# Altium PCB PCB_FreqResp.PcbDoc
Units mm, origin at the board's own origin, x right, y up, seen from the top; angles counter-clockwise.
Board outline 50.16 x 43.43 mm, 2 copper layers (Top Layer, Bottom Layer); 67 components, 38 nets, 235 pads, 54 vias.
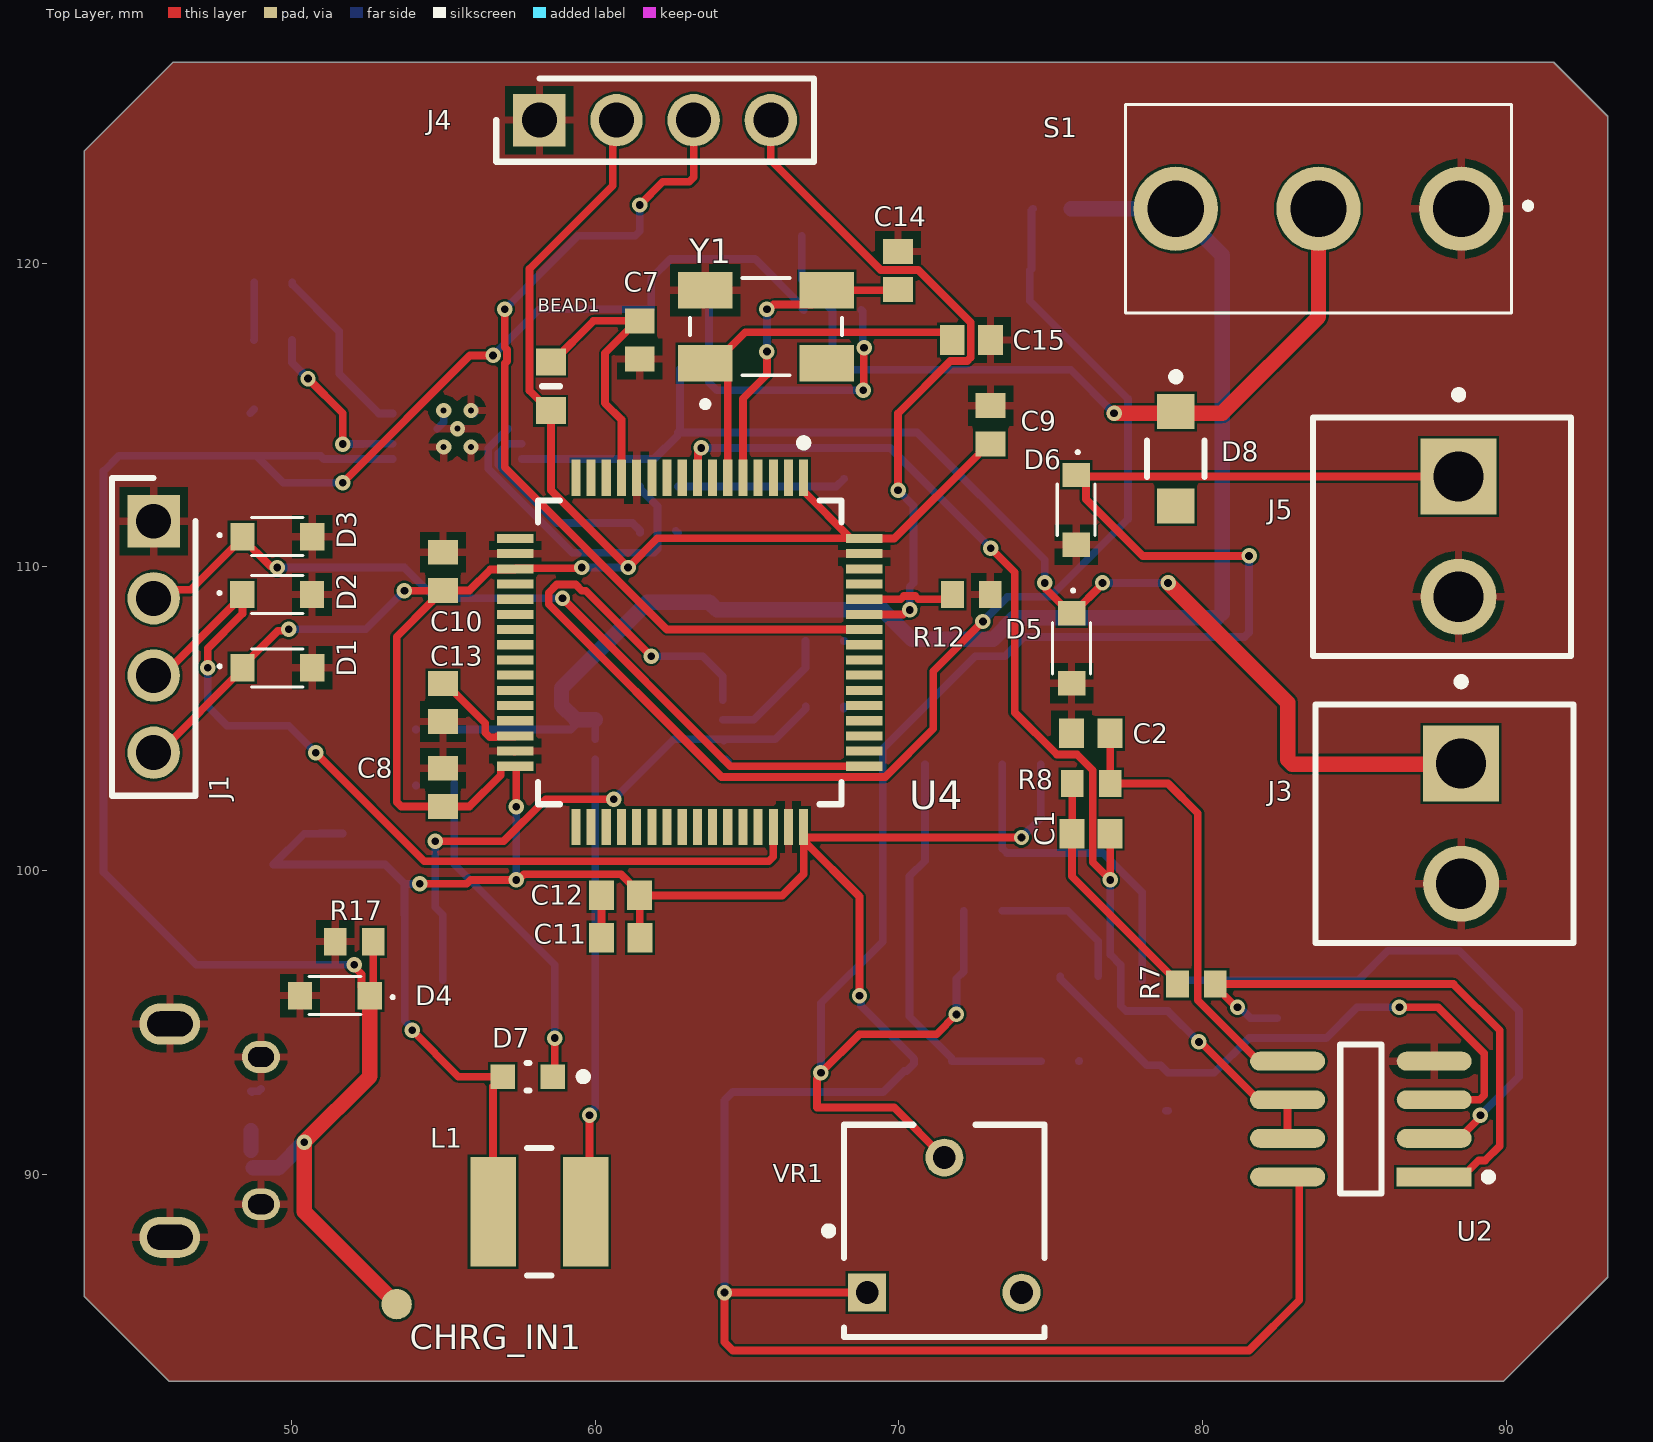
[diagram p0: Top Layer view]
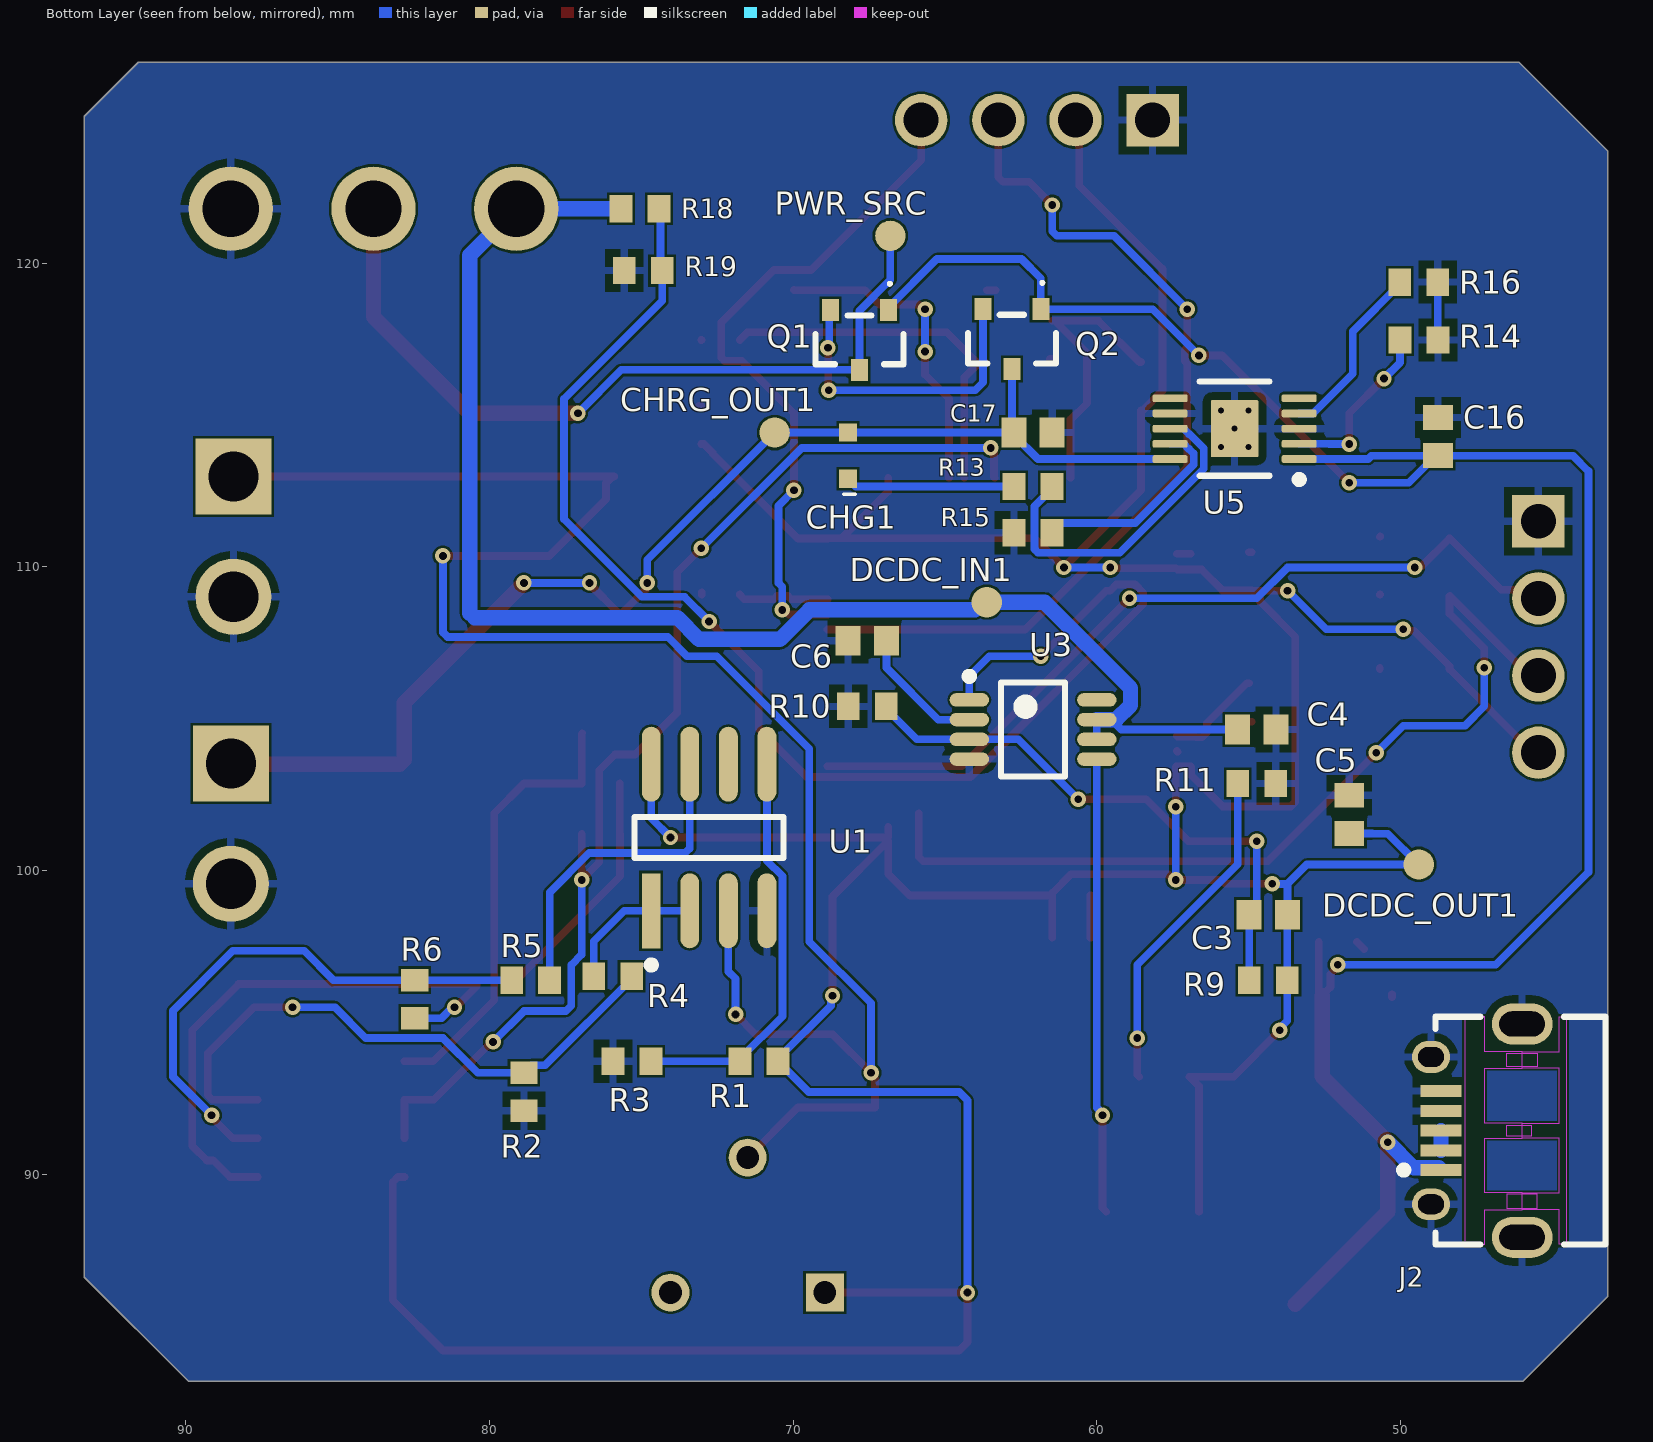
[diagram p1: Bottom Layer view, seen from below]
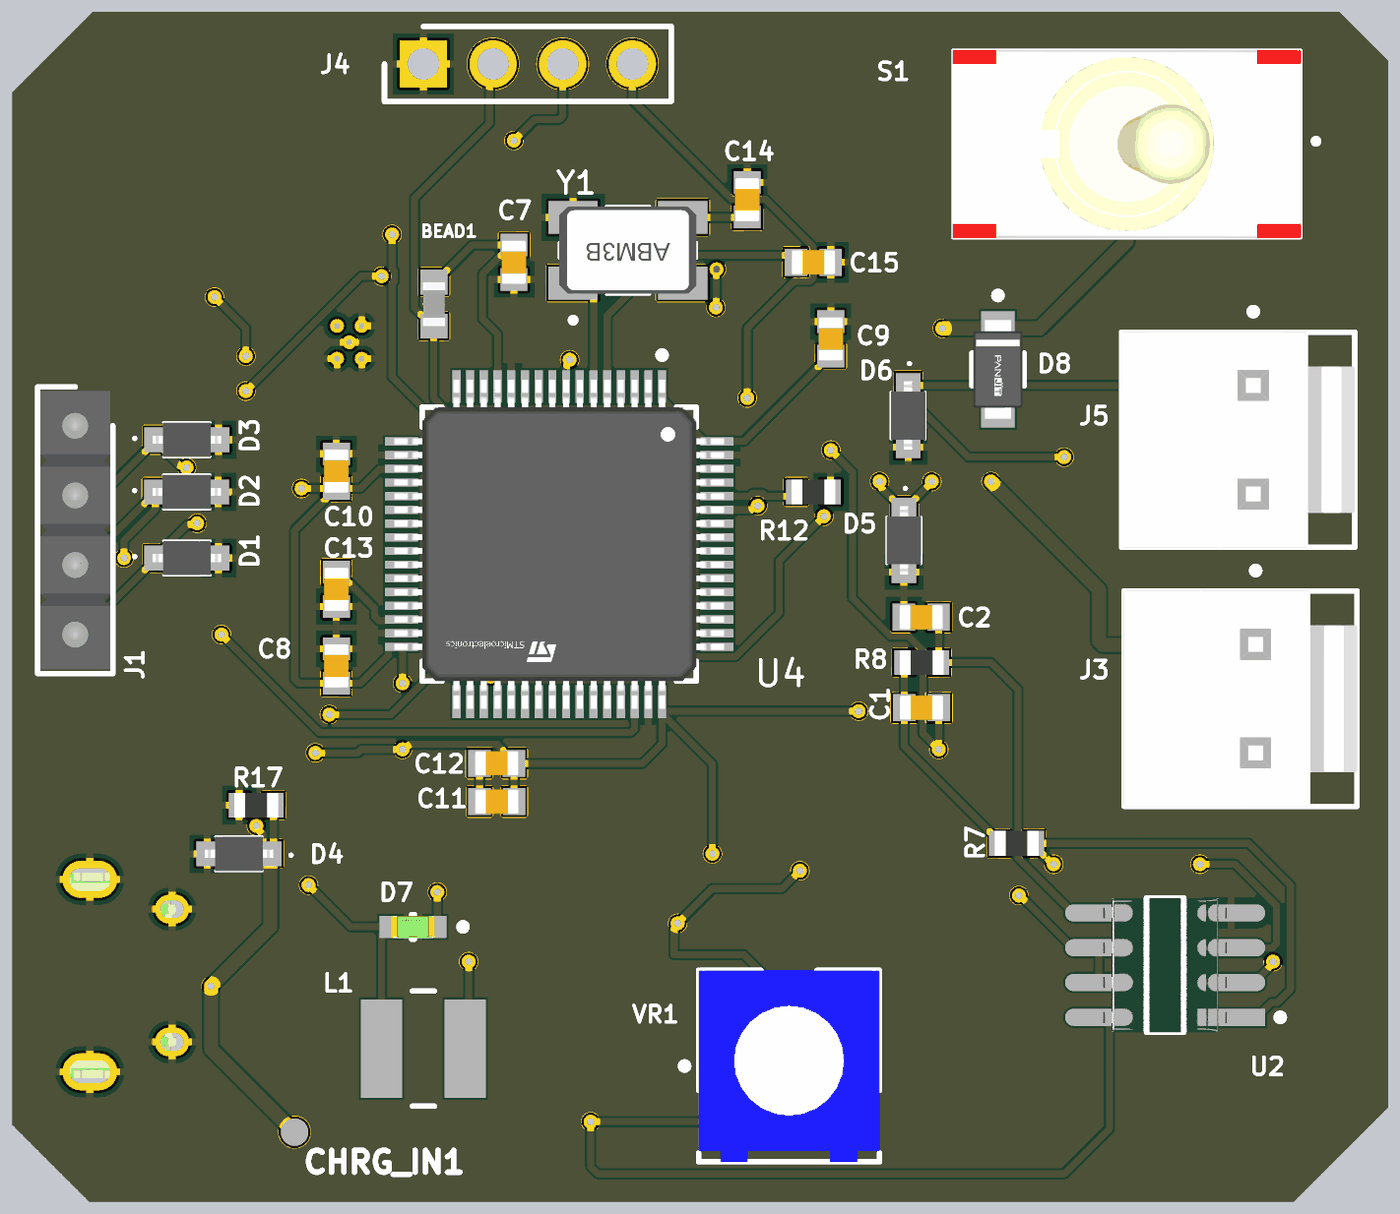
[diagram p2: 3D render of the assembled board from above, using the file's embedded part models]
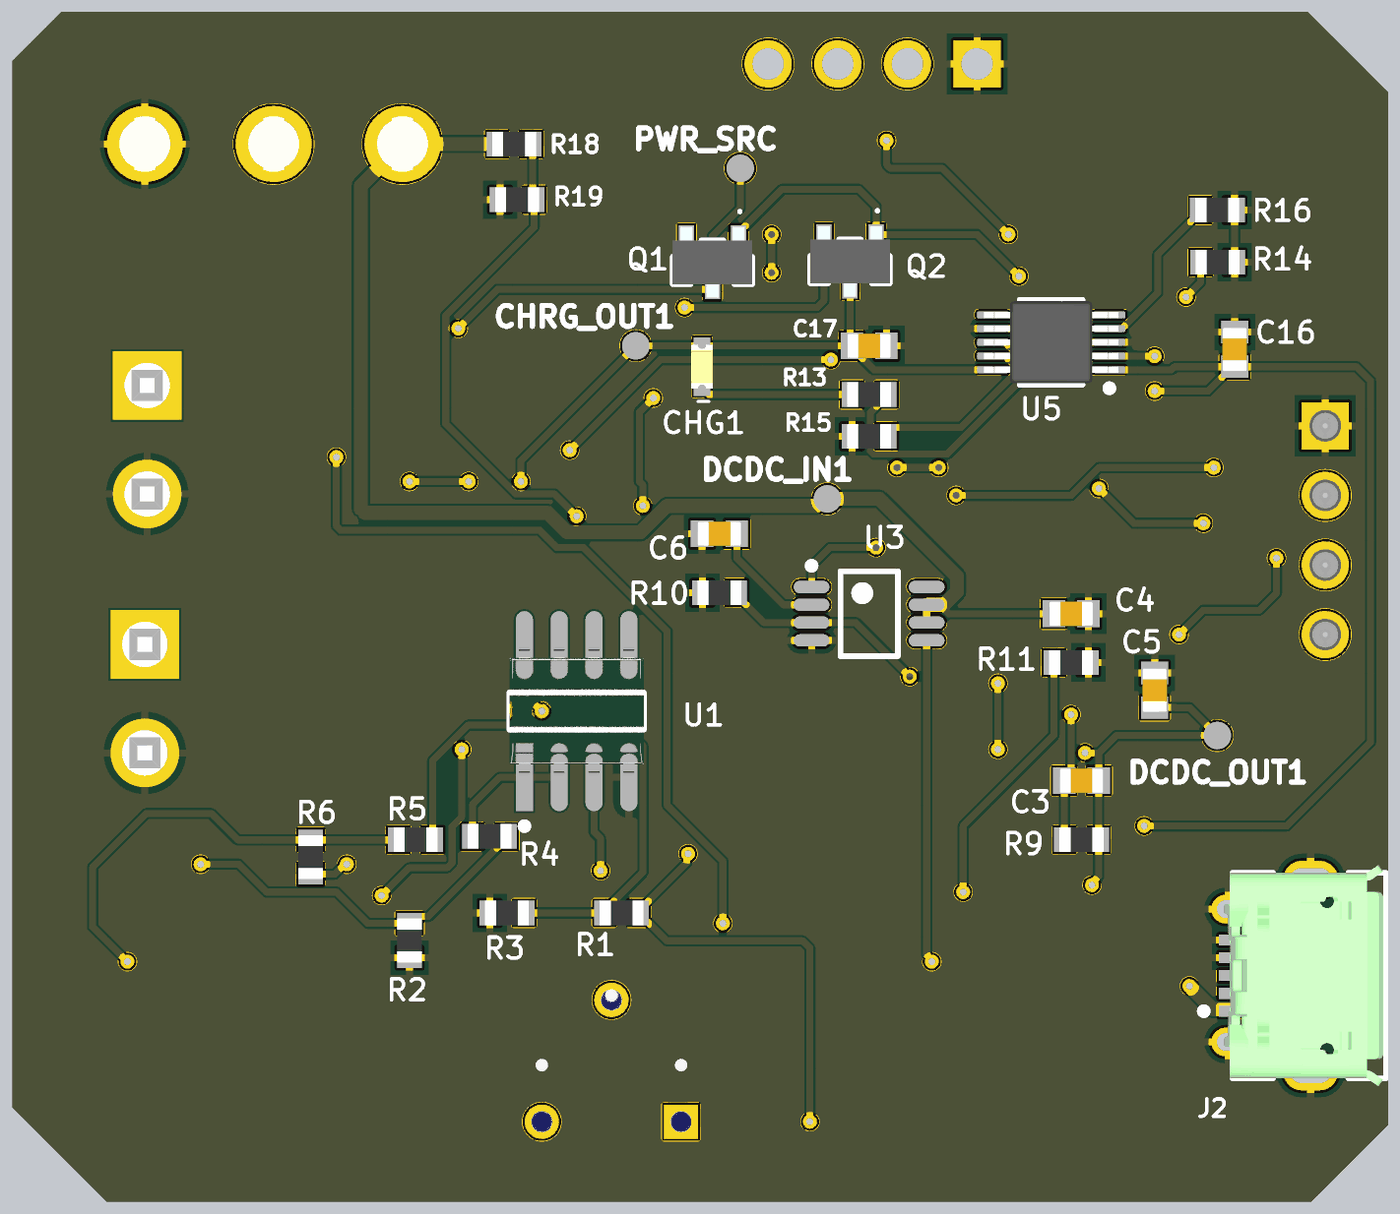
[diagram p3: 3D render of the assembled board from below, using the file's embedded part models]

## Layer stack, top to bottom
Top Solder: solder mask 0.0102, Solder Resist, Dk 3.5
Top Layer: signal copper 0.0356
Dielectric 1: dielectric 0.32, FR-4, Dk 4.8
Bottom Layer: signal copper 0.0356
Bottom Solder: solder mask 0.0102, Solder Resist, Dk 3.5

## Board outline
43.18,123.698 46.101,126.619 91.567,126.619 93.345,124.841 93.345,86.614 89.916,83.185 45.974,83.185 43.18,85.979 43.18,86.614

## Design rules (kind name [scope] priority, off if disabled: settings)
Clearance [All] p1: gap=0.076 ignorepadtopadclearanceinfootprint=FALSE except(0: Arc-Hole Track-Hole SMDPad-Hole THPad-Hole Via-Hole Fill-Hole Poly-Hole Region-Hole Text-Hole)
Height [All] p1: minheight=0 maxheight=30.4 prefheight=12.7
MinimumSolderMaskSliver [All] p1: minsoldermaskwidth=0.025
PolygonConnect [All] p1: connectstyle=Relief reliefconductorwidth=0.254 reliefentries=4 polygonreliefangle="90 Angle" airgapwidth=0.254
RoutingVias [All] p1: holewidth=0.254 width=0.508 viastyle="Through Hole" minholewidth=0.102 minwidth=0.203 maxholewidth=0.711 maxwidth=1.27
SilkToSilkClearance [All] p1: silktosilkclearance=0.127
SilkToSolderMaskClearance [IsPad] p1: minsilkscreentomaskgap=0 clearancetoexposedcopper=TRUE
SolderMaskExpansion [All] p1: expansion=0.102 istentingtop=FALSE
Width [All] p1: maxlimit=0.508 minlimit=0.254 preferedwidth=0.254 minimp=50.000000 maximp=50.000000 favimp=50.000000
26 further rules are at their usual default settings.

## Components (designator, comment, footprint, x,y, rotation, side; value= is the part's Value field where it differs from the comment)
BEAD1 "C710390" BEADC1608X95N 58.547,115.951 r90 top
C1 "C309479" "New footprint 1" 76.332,101.219 r0 top
C2 "C309479" "New footprint 1" 76.322,104.521 r0 top
C3 "C63680" "New footprint 1" 54.356,98.552 r180 bottom
C4 "C90806" "New footprint 1" 54.737,104.648 r0 bottom
C5 "C93926" "New footprint 1" 51.689,101.854 r270 bottom
C6 "C113801" "New footprint 1" 67.564,107.569 r180 bottom
C7 "C105907" "New footprint 1" 61.468,117.475 r90 top
C8 "C309479" "New footprint 1" 54.991,102.743 r270 top
C9 "C105907" "New footprint 1" 73.025,114.681 r270 top
C10 "C105907" "New footprint 1" 54.991,109.855 r270 top
C11 "C105907" "New footprint 1" 60.843,97.79 r0 top
C12 "C105907" "New footprint 1" 60.838,99.187 r0 top
C13 "C77045" "New footprint 1" 54.991,105.537 r90 top
C14 "C63680" "New footprint 1" 69.977,119.761 r90 top
C15 "C63680" "New footprint 1" 72.39,117.475 r0 top
C16 "C309479" "New footprint 1" 48.768,114.295 r270 bottom
C17 "C77045" "New footprint 1" 62.103,114.427 r0 bottom
CHG1 "SMLD12EN1WT86" LEDM168X65N 68.199,113.665 r90 bottom
CHRG_IN1 "Test Pad" "Test Pad-Footprint-1" 53.467,85.725 r90 top (schematic designator Chgr_IN1)
CHRG_OUT1 "Test Pad" "Test Pad-Footprint-1" 70.612,114.427 r0 bottom (schematic designator Chgr_OUT1)
D1 "C484328" 1SS357TPH3F 49.537,106.68 r270 top
D2 "C484328" 1SS357TPH3F 49.53,109.093 r270 top
D3 "C484328" 1SS357TPH3F 49.537,110.998 r270 top
D4 "C484328" 1SS357TPH3F 51.435,95.885 r90 top
D5 "C484328" 1SS357TPH3F 75.692,107.322 r180 top
D6 "C484328" 1SS357TPH3F 75.844,111.88 r180 top
D7 "SMD 1.6X0.8MM" FP-APT1608LZGCK-MFG 57.785,93.218 r180 top
D8 "C191986" FP-MBR1020VL_R1_00001-MFG 79.121,113.564 r270 top
DCDC_IN1 "Test Pad" "Test Pad-Footprint-1" 63.627,108.839 r90 bottom
DCDC_OUT1 "Test Pad" "Test Pad-Footprint-1" 49.403,100.203 r180 bottom
J1 "61300411121" HDRV4W95P0X254_1X4_1016X254X854P 45.466,111.506 r270 top
J2 "ZX62D-B-5P8" HIRO-ZX62D-B-5P8_V 47.498,91.44 r90 bottom
J3 "B2P-VH-B(LF)(SN)" FP-B2P-VH-B_LF_SN-MFG 87.969,101.548 r270 top
J4 "61300411121" HDRV4W95P0X254_1X4_1016X254X854P 58.166,124.714 r0 top
J5 "B2P-VH-B(LF)(SN)" FP-B2P-VH-B_LF_SN-MFG 87.884,110.998 r270 top
L1 "C340379" FP-SRN4018-MFG 58.165,88.773 r180 top value=4.7uH
PWR_SRC "Test Pad" "Test Pad-Footprint-1" 66.802,120.904 r180 bottom (schematic designator Pwr_Src1)
Q1 "C113491" TSM260P02CXRFG 67.818,117.475 r0 bottom
Q2 "C113491" TSM260P02CXRFG 62.799,117.506 r0 bottom
R1 "C103210" "0603 resistor-Footprint-1" 71.13,93.726 r0 bottom
R2 "" "0603 resistor-Footprint-1" 78.867,92.72 r270 bottom
R3 "C103210" "0603 resistor-Footprint-1" 75.311,93.726 r0 bottom
R4 "C103198" "0603 resistor-Footprint-1" 75.946,96.52 r180 bottom
R5 "C103198" "0603 resistor-Footprint-1" 78.647,96.393 r0 bottom
R6 "" "0603 resistor-Footprint-1" 82.467,95.768 r270 bottom
R7 "C153133" "0603 resistor-Footprint-1" 79.8,96.266 r180 top
R8 "C153133" "0603 resistor-Footprint-1" 76.337,102.87 r0 top
R9 "C403386" "0603 resistor-Footprint-1" 54.356,96.393 r180 bottom
R10 "C100930" "0603 resistor-Footprint-1" 67.564,105.41 r0 bottom
R11 "C176127" "0603 resistor-Footprint-1" 54.737,102.87 r180 bottom
R12 "C103210" "0603 resistor-Footprint-1" 72.39,109.093 r0 top
R13 "C176127" "0603 resistor-Footprint-1" 62.103,112.649 r0 bottom
R14 "C116693" "0603 resistor-Footprint-1" 49.393,117.475 r180 bottom
R15 "C153133" "0603 resistor-Footprint-1" 62.103,111.125 r0 bottom
R16 "C105576" "0603 resistor-Footprint-1" 49.403,119.38 r180 bottom
R17 "C103210" "0603 resistor-Footprint-1" 52.07,97.663 r180 top
R18 "C153133" "0603 resistor-Footprint-1" 75.047,121.793 r180 bottom
R19 "C153133" "0603 resistor-Footprint-1" 74.94,119.761 r0 bottom
S1 "100SP1T1B4M2QE" 100SP1T1B4M2QE 83.821,121.793 r180 top
U1 "LM358BAIDR" FP-D0008A-IPC_A 72.771,101.093 r90 bottom
U2 "LM358BAIDR" FP-D0008A-IPC_A 85.218,91.821 r180 top
U3 "LTC3404EMS8#PBF" LT-MS8_L 62.103,104.648 r180 bottom
U4 "STM32F401RET6" FP-LQFP64-5W-MFG 63.119,107.188 r270 top
U5 "BQ24090DGQR" DGQ0010D_L 55.465,114.554 r0 bottom
VR1 "3362P-1-103LF" BOUR-3362P 71.501,88.138 r0 top
Y1 "ABM3B-8.000MHZ-10-1UT" XTAL_ABM3B-8.000MHZ-10-1UT 65.627,117.913 r0 top

## Footprints (in the part's own frame and the unit in brackets; to place one, negate y for a bottom-side part, rotate by r counter-clockwise, add the part's x,y. Pads: shape width x height; smd on the part's side, far side on the other; paste and mask are expansions set on the pad)
1SS357TPH3F [mm]
  rect 0.9x0.8 smd: 1(0,-1.15) 2(0,1.15)
  silkscreen extent -0.63,-1.95 0.63,0.85, body extent -0.63,-1.25 0.63,1.25, height 0.9
100SP1T1B4M2QE [mm]
  round 2.775 hole 1.85: 1(-4.7,0) 2(0,0) 3(4.7,0)
  silkscreen extent -7,-3.43 6.35,3.43, body extent -6.35,-3.43 6.35,3.43, height 29.21
"0603 resistor-Footprint-1" [mm]
  rect 0.75x0.9 smd: 1(-0.625,0) 2(0.625,0)
  body extent -0.8,-0.45 0.8,0.45, height 0.4
BEADC1608X95N [mm]
  rect 0.9x1 smd: 1(-0.8,0) 2(0.8,0)
  silkscreen extent 0,-0.3 0,0.3, body extent -0.8,-0.4 0.8,0.4, height 0.95
BOUR-3362P [mm] "THD, 3-Leads, Body 6.6x6.99mm, Pitch 2.54mm"
  rect 1.25x1.25 hole 0.75: 1(-2.54,-2.032)
  round 1.25 hole 0.75: 2(0,2.413) 3(2.54,-2.032)
  silkscreen extent -3.93,-3.49 3.3,3.5, body extent -3.3,-3.49 3.3,3.5, height 4.5
DGQ0010D_L [mm] "TSOP, 10-Leads, Body 3.1x3.1mm, Pitch 0.5mm, Thermal Pad 1.88x1.57mm, IPC High Density"
  rrect40% 1.15x0.25 smd: 1(-2.125,1) 2(-2.125,0.5) 3(-2.125,0) 4(-2.125,-0.5) 5(-2.125,-1) 6(2.125,-1) 7(2.125,-0.5) 8(2.125,0) 9(2.125,0.5) 10(2.125,1)
  rrect6% 1.57x1.88 smd: 11(0,0)
  silkscreen extent -2.25,-1.55 1.15,1.8, body extent -2.45,-1.5 2.45,1.5, height 0.94
FP-APT1608LZGCK-MFG [mm]
  rect 0.8x0.8 smd paste+0 mask+0: 1(-0.825,0) 2(0.825,0)
  silkscreen extent -1.95,-0.45 0.05,0.45, body extent -1.33,-0.55 1.33,0.55, height 0.25
FP-B2P-VH-B_LF_SN-MFG [mm]
  rect 2.5x2.5 hole 1.65 paste-2539.97 mask+0: 1(-1.98,0.55)
  round 2.5 hole 1.65 paste-2539.97 mask+0: 2(1.98,0.55)
  silkscreen extent -4.8,-4.25 3.93,4.25, body extent -4.03,-4.35 4.03,4.35, height 0.25
FP-D0008A-IPC_A [mm]
  rect 2.469x0.622 smd paste+0 mask+0: 1(-2.414,1.905)
  rrect100% 2.469x0.622 smd paste+0 mask+0: 2(-2.414,0.635) 3(-2.414,-0.635) 4(-2.414,-1.905) 5(2.414,-1.905) 6(2.414,-0.635) 7(2.414,0.635) 8(2.414,1.905)
  silkscreen extent -4.32,-2.45 0.68,2.45, body extent -3,-2.45 3,2.45, height 1.75
FP-LQFP64-5W-MFG [mm]
  rect 1.2x0.3 smd paste+0 mask+0: 1(-5.75,3.75) 2(-5.75,3.25) 3(-5.75,2.75) 4(-5.75,2.25) 5(-5.75,1.75) 6(-5.75,1.25) 7(-5.75,0.75) 8(-5.75,0.25) 9(-5.75,-0.25) 10(-5.75,-0.75) 11(-5.75,-1.25) 12(-5.75,-1.75) 13(-5.75,-2.25) 14(-5.75,-2.75) 15(-5.75,-3.25) 16(-5.75,-3.75) 33(5.75,-3.75) 34(5.75,-3.25) 35(5.75,-2.75) 36(5.75,-2.25) 37(5.75,-1.75) 38(5.75,-1.25) 39(5.75,-0.75) 40(5.75,-0.25) 41(5.75,0.25) 42(5.75,0.75) 43(5.75,1.25) 44(5.75,1.75) 45(5.75,2.25) 46(5.75,2.75) 47(5.75,3.25) 48(5.75,3.75)
  rect 0.3x1.2 smd paste+0 mask+0: 17(-3.75,-5.75) 18(-3.25,-5.75) 19(-2.75,-5.75) 20(-2.25,-5.75) 21(-1.75,-5.75) 22(-1.25,-5.75) 23(-0.75,-5.75) 24(-0.25,-5.75) 25(0.25,-5.75) 26(0.75,-5.75) 27(1.25,-5.75) 28(1.75,-5.75) 29(2.25,-5.75) 30(2.75,-5.75) 31(3.25,-5.75) 32(3.75,-5.75) 49(3.75,5.75) 50(3.25,5.75) 51(2.75,5.75) 52(2.25,5.75) 53(1.75,5.75) 54(1.25,5.75) 55(0.75,5.75) 56(0.25,5.75) 57(-0.25,5.75) 58(-0.75,5.75) 59(-1.25,5.75) 60(-1.75,5.75) 61(-2.25,5.75) 62(-2.75,5.75) 63(-3.25,5.75) 64(-3.75,5.75)
  silkscreen extent -7.02,-5 5,5, body extent -6.45,-6.45 6.45,6.45, height 0.25
FP-MBR1020VL_R1_00001-MFG [mm]
  rect 1.15x1.22 smd paste+0 mask+0: 1(-1.55,0) 2(1.55,0)
  silkscreen extent -2.82,-0.95 0.6,0.95, body extent -2.22,-1.05 2.22,1.05, height 0.25
FP-SRN4018-MFG [mm]
  rect 1.5x3.6 smd paste+0 mask+0: 1(-1.525,0) 2(1.525,0)
  silkscreen extent -0.4,-2.1 0.4,2.1
HDRV4W95P0X254_1X4_1016X254X854P [mm]
  rect 1.725x1.725 / inner round 1.725 / far side rect 1.725x1.725 hole 1.15: 1(0,0)
  round 1.725 hole 1.15: 2(2.54,0) 3(5.08,0) 4(7.62,0)
  silkscreen extent -1.42,-1.37 9.04,1.37, body extent -1.27,-1.27 8.89,1.27, height 8.54
HIRO-ZX62D-B-5P8_V [mm] "Micro-USB Connector, 9-Leads, Body 7.5x5.6mm, Pitch 0.65mm"
  rect 0.4x1.35 smd: 1(-1.3,1.175) 2(-0.65,1.175) 3(0,1.175) 4(0.65,1.175) 5(1.3,1.175)
  oval 1.05x1.25 hole 0.65 slot 0.85 at 90 deg: 6(-2.425,1.5) 7(2.425,1.5)
  oval 1.35x2 hole 0.825 slot 1.5 at 90 deg: 8(-3.512,-1.5) 9(3.512,-1.5)
  Top Layer keep-out region: 2.55,-2 2.1,-2 2.1,-1 2.55,-1
  Top Layer keep-out region: -2.55,-2 -2.1,-2 -2.1,-1 -2.55,-1
  Top Layer keep-out region: -0.18,-1.8 -0.18,-1 0.18,-1 0.18,-1.8
  Top Layer keep-out region: -3.75,-2.725 -2.6,-2.725 -2.6,-1.5 -2.05,-1.5 -2.05,-2.725 -0.25,-2.725 -0.25,-1.5 0.25,-1.5 0.25,-2.725 2.05,-2.725 2.05,-1.5 2.6,-1.5 2.6,-2.725 3.75,-2.725 3.75,-2.95 -3.75,-2.95
  Top Layer keep-out region: -2.6,-1.5 -2.05,-1.5 -2.05,-0.275 -0.25,-0.275 -0.25,-1.5 0.25,-1.5 0.25,-0.275 2.05,-0.275 2.05,-1.5 2.6,-1.5 2.6,-0.275 3.75,-0.275 3.75,0.395 -3.75,0.395 -3.75,-0.275 -2.6,-0.275
  silkscreen extent -3.75,-4.25 3.75,2.52, body extent -4.05,-4.15 4.05,1.65, height 2.75
LEDM168X65N [mm]
  rect 0.6x0.6 smd: 1(-0.762,0) 2(0.762,0)
  silkscreen extent -1.27,-0.25 -1.27,0.15, body extent -0.8,-0.4 0.8,0.4, height 0.55
LT-MS8_L [mm] "SOP, 8-Leads, Body 3.1x3.1mm, Pitch 0.65mm, IPC High Density"
  oval 1.3x0.45 smd: 1(-2.1,0.975) 2(-2.1,0.325) 3(-2.1,-0.325) 4(-2.1,-0.975) 5(2.1,-0.975) 6(2.1,-0.325) 7(2.1,0.325) 8(2.1,0.975)
  silkscreen extent -2.23,-1.55 1.05,1.87, body extent -1.55,-1.55 1.55,1.55, height 1.1
"New footprint 1" [mm]
  rect 0.82x0.98 smd: 1(-0.63,0) 2(0.63,0)
  body extent -0.8,-0.45 0.8,0.45, height 0.4
"Test Pad-Footprint-1" [mm]
  round 1 smd: 1(0,0)
TSM260P02CXRFG [mm]
  rect 0.56x0.725 smd: 1(-0.95,-0.985) 2(0,0.985) 3(0.95,-0.985)
  silkscreen extent -1.45,-1.9 1.45,0.8, body extent -1.45,-1.29 1.45,1.29, height 1.55
XTAL_ABM3B-8.000MHZ-10-1UT [mm]
  rect 1.8x1.2 smd: 1(-2,-1.2) 2(2,-1.2) 3(2,1.2) 4(-2,1.2)
  silkscreen extent -2.5,-2.65 2.5,1.6, body extent -2.5,-1.59 2.5,1.59, height 1.1

## Part data
BEAD1: library part CMP-038-000000-3, "MURATA Ferrite Beads 120 OHM - BLM18SG121TZ1D", Manufacturer_Name="Walsin Technology Corporation", Manufacturer_Part_Number=WLBD1608K1U601TB, Mouser Part Number=791-WLBD1608K1U601TB, Datasheet Link=https://www.mouser.fr/datasheet/2/210/kamaya_watc-s-a0003407801-1-1749693.pdf, Design Item ID=WLBD1608K1U601TB, Geometry.Height=0.95mm, Mouser Price/Stock=https://www.mouser.co.uk/ProductDetail/Walsin/WLBD1608K1U601TB/?qs=ZrPdAQfJ6DPLMgkQk27DNg%3D%3D, Source=WLBD1608K1U601TB.SchLib
C1 C2 C8 C16: library part CMP-001-00083-1, "6.3V 1uF X7R ±10% 0603  Multilayer Ceramic Capacitors MLCC - SMD/SMT ROHS"
C3 C14 C15: library part CMP-001-00083-1, "200V 20pF C0G ±5% 0603 Multilayer Ceramic Capacitors MLCC - SMD/SMT ROHS"
C4: library part CMP-001-00083-1, "10V 10uF X5R ±10% 0603 Multilayer Ceramic Capacitors MLCC - SMD/SMT ROHS"
C5: library part CMP-001-00083-1, "6.3V 22uF X5R ±20% 0603 Multilayer Ceramic Capacitors MLCC - SMD/SMT ROHS"
C6: library part CMP-001-00083-1, "250V 47pF NP0 ±5% 0603 Multilayer Ceramic Capacitors MLCC - SMD/SMT ROHS"
C7 C9 C10 C11 C12: library part CMP-001-00083-1, "100V 100nF X7R ±10% 0603  Multilayer Ceramic Capacitors MLCC - SMD/SMT ROHS"
C13 C17: library part CMP-001-00083-1, "116V 4.7uF X5R ±10% 0603 Multilayer Ceramic Capacitors MLCC - SMD/SMT ROHS"
CHG1: library part CMP-004-00034-1, "Standard LEDs - SMD 1.6X0.8MM LOW CRNT", Manufacturer_Name="ROHM Semiconductor", Mouser Part Number=755-SMLD12EN1WT86, Datasheet Link=https://datasheet.datasheetarchive.com/originals/distributors/Datasheets_SAMA/8f824a900f8c9a143b1c3640e6aee7b7.pdf, Design Item ID=SMLD12EN1WT86, Geometry.Height=0.65mm, Manufacturer_Part_Number=SMLD12EN1WT86, Mouser Price/Stock=https://www.mouser.co.uk/ProductDetail/ROHM-Semiconductor/SMLD12EN1WT86?qs=qSfuJ%252Bfl%2Fd4fR%252B9yZydIwg%3D%3D, Source=SMLD12EN1WT86.SchLib
CHRG_IN1 CHRG_OUT1 DCDC_IN1 DCDC_OUT1 PWR_SRC: library part CMP-00030-00001-1
D1 D2 D3 D4 D5 D6: library part CMP-004-00033-2, "13.3V 19V 12V SOD-323  ESD Protection Devices ROHS", Arrow Part Number=DF2B36FU,H3F, Manufacturer_Name=Toshiba, Mouser Part Number=757-DF2B36FUH3F, Arrow Price/Stock=https://www.arrow.com/en/products/df2b36fuh3f/toshiba?region=nac, Datasheet Link=http://toshiba.semicon-storage.com/info/docget.jsp?did=36248&prodName=DF2B36FU, Design Item ID=DF2B36FU,H3F, Height=1mm, Manufacturer_Part_Number=DF2B36FU,H3F, Mouser Price/Stock=https://www.mouser.co.uk/ProductDetail/Toshiba/DF2B36FUH3F?qs=PDgMCp4xDJY7HvoH3U6rfA%3D%3D, Source=SamacSys.SchLib
D7: library part CMP-44529-000040-1, "Standard LEDs - SMD 1.6X0.8MM LOW CRNT", Case Code (Imperial)=0603, Case Code (Metric)=1608, Color=Green, Forward Voltage=2.65V, Lens Color=Colorless, Test Current=2mA, Case/Package=0603, Dominant Wavelength=525nm, Height=0.75mm, Length=1.6mm, Lens Transparency=Clear, Luminous Intensity=50mcd, Mount="Surface Mount", Packaging="Cut Tape", Viewing Angle=120°, Width=0.8mm
D8: library part CMP-34900-000005-1, "20V 340mV@1A 1A SOD-123F  Schottky Barrier Diodes (SBD) ROHS", RoHS Compliant=Yes
J1: library part CMP-002-00071-5, "WR-PHD 2.54mm Pin Header THT Straight 4p Wurth Elektronik WR-PHD Series, Series Number 6130, 2.54mm Pitch 4 Way 1 Row Straight PCB Header, Solder Termination", Manufacturer_Name="Wurth Elektronik", Mouser Part Number=710-61300411121, Datasheet Link=http://katalog.we-online.de/em/datasheet/6130xx11121.pdf, Design Item ID=61300411121, Geometry.Height=8.54mm, Manufacturer_Part_Number=61300411121, Mouser Price/Stock=https://www.mouser.co.uk/ProductDetail/Wurth-Elektronik/61300411121?qs=PhR8RmCirEYQcLLqXD8rAA%3D%3D, Source=61300411121.SchLib
J2: library part CMP-002-00043-2, "Right Angle Receptacle Connector, Micro USB, 5 Position, Height 2.65 mm, -30 to 85 degC, RoHS, Tape and Reel", Current Rating=1A, Manufacturer="Hirose Electric", Max Operating Temperature=85°C, Min Operating Temperature=-30°C, Package Description="USB Connector, 5 Position Surface Mount, Length 8 mm, Height 2.65 mm", Package Quantity=2000, Case/Package=ZX62D-B-5P8, Connector Type=USB, Contact Material=Copper, Contact Plating=Gold, Datasheet URL=https://www.hirose.com/product/en/download_file/key_name/ZX62D-B-5P8/category/Catalog/doc_file_id/31704/?file_category_id=5&item_id=02420034000&is_series=, Datasheet Version=Aug-16, Gender=Male, Housing Material=Plastic, Lead Pitch=0.65mm, Manufacturer URL=https://www.hirose.com, Mounting Technology=SM, Package Reference=ZX62D-B-5P8, Package URL=https://www.hirose.com/product/en/download_file/key_name/ZX62D-B-5P8/category/Drawing%20(2D)/doc_file_id/36535/?file_category_id=6&item_id=02420034000&is_series=, Packaging=TapeandReel, Pins=5, RoHS Compliant=True, Rows=1
J3 J5: library part CMP-17439-000297-1, "CONN HEADER VERT 2POS 3.96MM", Color=Natural, Flammability Rating="UL94 V-0", Voltage Rating=250V, Connector Type=Header, Contact Finish - Mating=TIN, Contact Material=Brass, Contact Mating Length=0.303inch, Contact Plating=Tin, Contact Shape=Square, Contact Type="Male Pin", Fastening Type=Friction, Insulation Color=Natural, Insulation Material=PBT, Lead Free="Lead Free", Mount="Through Hole", Number of Positions=2, Number of Rows=1, Packaging=Bulk, Pitch=0.156inch, Series=VH, Termination=Solder
J4: library part CMP-002-00071-1, "WR-PHD 2.54mm Pin Header THT Straight 4p Wurth Elektronik WR-PHD Series, Series Number 6130, 2.54mm Pitch 4 Way 1 Row Straight PCB Header, Solder Termination", Manufacturer_Name="Wurth Elektronik", Mouser Part Number=710-61300411121, Datasheet Link=http://katalog.we-online.de/em/datasheet/6130xx11121.pdf, Design Item ID=61300411121, Geometry.Height=8.54mm, Manufacturer_Part_Number=61300411121, Mouser Price/Stock=https://www.mouser.co.uk/ProductDetail/Wurth-Elektronik/61300411121?qs=PhR8RmCirEYQcLLqXD8rAA%3D%3D, Source=61300411121.SchLib
L1: library part CMP-07248-000014-1, "1.9A 4.7uH ±20% 2A SMD,4x4mm  Power Inductors ROHS", Inductance=4.7uH, Manufacturer=Bourns, Manufacturer Part Number=SRN4018-4R7M, Package=SRN4018, Rms Current=1.9A, Saturation Current=2A, Self Resonant Frequency=35MHz, Series Resistance=0.084Ω, Temperature="-40°C to +125°C", Temperature Range High=+125°C, Temperature Range Low=-40°C, Test Frequency=7.96MHz, Tolerance=20%, Automotive=No, Category=Ind, ComponentLink2Description=Datasheet, ComponentLink2URL=https://www.bourns.com/docs/Product-Datasheets/SRN4018.pdf, Composition=Wirewound, Core Material=Ferrite, Device Class L1="Passive Components", Device Class L2=Inductors, Device Class L3="Fixed Inductors", Digikey Description="FIXED IND 4.7UH 1.9A 84 MOHM SMD", Height=1.8mm, Lead Free=Yes, Mouser Description="Fixed Inductors 4.7uH 20% SMD 4018", Octopart=https://octopart.com/srn4018-4r7m-bourns-25452396, Q Factor=9, RoHS=TRUE, Shielding=true
Q1 Q2: library part CMP-010-000000-2, "20V 6.5A 1.4W 27mΩ@4.5V,6.5A N Channel SOT-23(TO-236)  MOSFETs ROHS", Manufacturer_Name="Taiwan Semiconductor", Manufacturer_Part_Number="TSM260P02CX RFG", Mouser Part Number=821-TSM260P02CXRFG, Datasheet Link=https://www.taiwansemi.com/assets/uploads/datasheet/TSM260P02_D1811.pdf, Design Item ID=TSM260P02CX_RFG, Geometry.Height=1.45mm, Mouser Price/Stock=https://www.mouser.co.uk/ProductDetail/Taiwan-Semiconductor/TSM260P02CX-RFG?qs=BZBei1rCqCB5JwyWPOdghw%3D%3D, Source=TSM260P02CX_RFG.SchLib
R1 R3 R12 R17: library part CMP-009-00177-1, "100mW Thick Film Resistors ±100ppm/℃ ±5% 10kΩ 0603 Chip Resistor - Surface Mount ROHS"
R2 R6: library part CMP-009-00177-1
R4 R5: library part CMP-009-00177-1, "100mW ±100ppm/℃ ±1% 1kΩ 0603  Chip Resistor - Surface Mount ROHS"
R7 R8 R15 R18 R19: library part CMP-009-00177-1, "100mW Thick Film Resistors ±5% ±200ppm/℃ 100kΩ 0603 Chip Resistor - Surface Mount ROHS"
R9: library part CMP-009-00177-1, "100mW Thick Film Resistors ±100ppm/℃ ±1% 887000Ω 0603 Chip Resistor - Surface Mount ROHS"
R10: library part CMP-009-00177-1, "100mW Thick Film Resistors ±100ppm/℃ ±1% 280kΩ 0603 Chip Resistor - Surface Mount ROHS"
R11 R13: library part CMP-009-00177-1, "100mW Thick Film Resistors ±100ppm/℃ ±1% 100Ω 0603 Chip Resistor - Surface Mount ROHS"
R14: library part CMP-009-00177-1, "100mW ±100ppm/℃ ±1% 4.7kΩ 0603 Chip Resistor - Surface Mount ROHS"
R16: library part CMP-009-00177-1, "100mW Thick Film Resistors ±100ppm/℃ ±1% 2kΩ 0603 Chip Resistor - Surface Mount ROHS"
S1: library part CMP-011-00013-1, "E-SWITCH - 100SP1T1B4M2QE - SWITCH", Manufacturer_Name=E-Switch, Mouser Part Number=612-100-A1421, Datasheet Link=http://spec_sheets.e-switch.com/specs/T111597.pdf, Design Item ID=100SP1T1B4M2QE, Height=28mm, Manufacturer_Part_Number=100SP1T1B4M2QE, Mouser Price/Stock=https://www.mouser.co.uk/ProductDetail/E-Switch/100SP1T1B4M2QE?qs=YXf4ACKMM4xJ0mJK%2FyIa1g%3D%3D, Source=SamacSys.SchLib
U1 U2: library part CMP-04895-000406-1, "SOP-8  Operational Amplifier ROHS"
U3: library part CMP-0492-01333-1, "Step-down type Adjustable 600mA 2.65V~6V 0.8V~6V MSOP-8  DC-DC Converters ROHS", Frequency Sync Range="1MHz - 1.7MHz", Manufacturer="Linear Technology", ComponentLink1Description="Manufacturer URL", ComponentLink1URL=http://www.linear.com/, ComponentLink2Description=Datasheet, ComponentLink2URL=http://cds.linear.com/docs/en/datasheet/3404fb.pdf, ComponentLink3Description="Package Specification", ComponentLink3URL=http://cds.linear.com/docs/en/packaging/05081660_G_MS8.pdf, DatasheetVersion="Rev. B", Mounting Technology="Surface Mount", Number of Outputs=1, PackageDescription="8-Pin Plastic MSOP, Body 3 x 3 mm, Pitch 0.65 mm", PackageReference=MS8, PackageVersion="Rev. G, 05/2013", PartNumber=LTC3404EMS8#PBF, RoHS=TRUE
U4: library part CMP-12105-000004-1, "512KB 1.7V~3.6V ARM Cortex-M4 84MHz 50 LQFP-64(10x10)  Microcontroller Units (MCUs/MPUs/SOCs) ROHS", Ambient Temperature Range High=+85°C, Ambient Temperature Range Low=-40°C, Frequency=84MHz, Manufacturer=STMicroelectronics, Max Junction Temp=+105°C, Max Supply Voltage=3.6V, Min Supply Voltage=1.65V, Package=LQFP64-5W, Temperature="-40°C to +105°C", Automotive=No, Category=IC, ComponentLink2Description=Datasheet, ComponentLink2URL=https://www.st.com/resource/en/datasheet/stm32f401re.pdf, Core Architecture="ARM Cortex-M4", Data Bus Width=32bits, Device Class L1="Integrated Circuits (ICs)", Device Class L2="Embedded Processors and Controllers", Device Class L3=Microcontrollers, Digikey Description="IC MCU 32BIT 512KB FLASH 64LQFP", Height=1.6mm, Interface=I2C,SPI,USART,USB,IrDA,I2S,SMBus,Other, Ipc Land Pattern Name=QFP50P1200X1200X160-64, Lead Free=Yes, Manufacturer Part Number=STM32F401RET6, Memory Size=512KBytes, Memory Type=FLASH, Mouser Description="ARM Microcontrollers - MCU 16/32-BITS MICROS", Number Of A/D Converters=1, Number Of Adc Channels=12, Number Of Cores=1, Number Of I2C Channels=3, Number Of I/Os=50, Number Of Pwm Channels=23, Number Of Spi Channels=3, Number Of Timers/Counters=8, Number Of Uart Channels=3, Number Of Usb Channels=1, Octopart=https://octopart.com/stm32f401ret6-stmicroelectronics-34185993, Ram Size=96KBytes, RoHS=TRUE, Standoff Height=0.05mm, Temperature Range High=+105°C, Temperature Range Low=-40°C
U5: library part CMP-0321-00917-2, "6.45V 锂离子/Polymer 1 1A MSOP-10-EP  Battery Management ICs ROHS", Manufacturer="Texas Instruments", Over Voltage Protection=N, Code_JEDEC=MO-187-BA-T, ComponentLink1Description=Datasheet, ComponentLink1URL=http://www.ti.com/general/docs/lit/getliterature.tsp?genericPartNumber=BQ24090&fileType=pdf, DatasheetVersion=SLUS968C, Eco-Plan="Green (RoHS & no Sb/Br)", Lead Acid=N, Li-Ion=N, Li-Polymer=N, Mounting Technology="Surface Mount", NiCd=N, NiMH=N, PackageDescription="10-Pin PowerPAD Plastic Small Outline 0.5 mm Pitch, Exposed Pad", PackageReference=DGQ0010D, PackageVersion="revF, Nov-2011", PartNumber=BQ24090DGQR, SubFamily="Battery Charge Management", Vin(Min)(V)=4.5
VR1: library part CMP-009-00039-3, "±10% ±100ppm/℃ 500mW 10kΩ Plugin  Variable Resistors/Potentiometers ROHS", Case/Package=3326P, Manufacturer=Bourns, Package Description="3-Pin Through Hole Device, Body 6.6 x 6.99 mm, Pitch 2.54 mm", Package Quantity=250, Power=500mW, Resistance=10k, Tolerance=10%, Voltage Rating=300V, Composition="Potentiometer di LUCA", Lead Pitch=2.54mm, Package Reference=3326P, Packaging=Rail/Tube, Pins=3, RoHS Compliant=True
Y1: library part CMP-003-00030-1, "Crystal 8MHz Â±10ppm (Tol) Â±10ppm (Stability) 10pF FUND 200Ohm 4-Pin CSMD T/R", Case/Package=Package, Availability="In Stock", Check_prices=https://www.snapeda.com/parts/ABM3B-8.000MHZ-10-1UT/Abracon/view-part/?ref=eda, Component Type=Standard, Design Item ID=ABM3B-8.000MHZ-10-1UT, MF="Abracon Corporation", MP=ABM3B-8.000MHZ-10-1UT, Pins=4, Price=None, Purchase-URL=https://pricing.snapeda.com/search/part/ABM3B-8.000MHZ-10-1UT/?ref=eda, SnapEDA_Link=https://www.snapeda.com/parts/ABM3B-8.000MHZ-10-1UT/Abracon/view-part/?ref=snap, Source=ABM3B-8.000MHZ-10-1UT.SchLib

## Via types
v1: diameter 0.508, hole 0.254, Top Layer to Bottom Layer, 49 vias
v2: diameter 0.5, hole 0.2, Top Layer to Bottom Layer, 5 vias

## Nets (pads, with @x,y where several pads share a name; then routed paths per layer and width w, separated by ;. In a path a pad name is that pad's centre, name@x,y a point inside that pad or via, vN(x,y) a via of type N, cw(c..) or ccw(c..) an arc to the next point about the centre after c; other vN are vias at no path point)
3V3: BEAD1.1 C3.2 C5.2 C8.2 C9.2 C10.2 C11.2 C12.2 D1.1 D7.2 DCDC_OUT1.1 J1.4 J4.2 L1.2 R1.1 R9.2 U1.8 U2.8 U4.1 U4.19 U4.32 U4.48 U4.64 VR1.1 | length 167.1
  Top Layer w0.254: J1.4 45.643,103.886 48.387,106.63 D1.1 48.387,106.73 49.558,107.901 49.862,107.901 v1(49.911,107.95) ; v1(53.721,109.22) C10.2@54.906,109.22 ; v1(53.975,94.742) 55.499,93.218 D7.2 56.64,92.898 L1.2 ; v1(54.229,99.568) 55.777,99.568 55.904,99.695 v1(57.404,99.695) 57.473,99.695 57.658,99.88 60.855,99.88 61.473,99.262 C12.2@61.473,99.182 ; v1(57.404,102.108) 57.404,103.415 57.381,103.438 U4.32 56.919,103.438 56.896,103.415 56.896,103.147 55.862,102.113 C8.2 53.616,102.113 53.467,102.262 53.467,107.701 54.628,108.862 54.628,108.942 C10.2@54.906,109.22 ; v1(59.563,109.982) 59.541,109.96 57.391,109.96 U4.19 57.346,109.915 56.552,109.915 55.862,109.225 C10.2 54.911,109.225 C10.2@54.906,109.22 ; J4.2 60.579,124.587 60.579,122.555 57.844,119.82 57.844,115.804 58.497,115.151 BEAD1.1 58.547,112.522 v1(61.087,109.982) 62.052,110.947 U4.64@68.41,110.947 ; C11.2 C12.2@61.473,99.182 ; U4.48 66.869,101.115 66.892,101.092 v1(74.041,101.092) ; U4.1 66.869,112.488 U4.64@68.41,110.947 ; v1(68.707,95.885) 68.707,99.15 66.869,100.988 66.869,99.889 66.162,99.182 C12.2@61.473,99.182 ; VR1.1 v1(64.262,86.106) 64.262,84.477 64.538,84.201 81.534,84.201 83.185,85.852 83.185,89.746 83.015,89.916 U2.8 ; C9.2 72.945,114.051 72.662,113.768 72.662,113.75 69.85,110.938 U4.64 68.86,110.947 U4.64@68.41,110.947
  Bottom Layer w0.254: v1(49.911,107.95) 52.451,107.95 v1(53.721,109.22) ; C5.2 50.932,101.224 50.927,101.219 50.419,101.219 DCDC_OUT1.1 53.086,100.203 53.726,99.563 ; v1(53.975,94.742) 53.975,94.811 53.731,95.055 R9.2 53.731,98.547 C3.2 53.726,99.563 ; v1(54.229,99.568) 54.224,99.563 53.726,99.563 ; v1(57.404,99.695) v1(57.404,102.108) ; v1(59.563,109.982) v1(61.087,109.982) ; v1(64.262,86.106) 64.262,92.434 64.538,92.71 69.489,92.71 70.182,93.403 70.257,93.403 70.505,93.651 R1.1 70.505,93.801 68.756,95.55 68.756,95.836 v1(68.707,95.885) ; v1(74.041,101.092) 74.676,101.727 U1.8
AVDD: BEAD1.2 C7.2 U4.13 | length 9.3
  Top Layer w0.254: BEAD1.2 58.597,116.751 59.951,118.105 C7.2@61.388,118.105 ; U4.13 60.869,114.854 60.325,115.398 60.325,117.042 C7.2@61.388,118.105 ; C7.2 C7.2@61.388,118.105
"Band +": D6.1 J5.1 U1.3 VR1.2 | length 62
  Top Layer w0.254: VR1.2 69.85,92.202 67.31,92.202 67.31,93.149 67.437,93.276 v1(67.437,93.345) 68.707,94.615 71.247,94.615 v1(71.898,95.266) ; D6.1@75.896,112.978 D6.1@75.946,112.978 ; v1(81.534,110.363) 78.035,110.363 76.167,112.231 76.167,112.757 D6.1@75.946,112.978 ; J5.1 D6.1@75.946,112.978
  Bottom Layer w0.254: v1(67.437,93.345) 67.437,95.631 69.469,97.663 69.469,104.013 72.517,107.061 73.497,107.061 74.132,107.696 81.385,107.696 81.534,107.845 v1(81.534,110.363) ; v1(71.898,95.266) 71.898,96.441 72.136,96.679 U1.3
GND: C2.1 C4.1 C5.1 C6.1 C7.1 C8.1 C9.1 C10.1 C13.1 C14.2 C15.2 C16.1 C17.1 D1.2 D2.2 D3.2 D4.2 D5.2 D6.2 J1.1 J2.4 J2.5 J2.6 J2.7 J2.8 J2.9 J3.2 J4.1 J5.2 R2.2 R3.2 R10.2 R11.2 R12.2 R14.2 R15.2 R16.2 R17.2 R19.2 S1.1 U1.4 U2.4 U3.4 U4.12 U4.18 U4.31 U4.47 U4.63 U5.3 U5.7 U5.11 Y1.4 | length 8.1
  Top Layer w0.254: J1.1 J1.1@45.974,112.014 ; J2.6@48.898,89.015 J2.6 ; J2.7@48.898,93.865 J2.7 J2.7@49.221,94.088 ; D4.2@50.285,95.835 D4.2 D4.2@50.285,95.935 ; D3.2@50.673,111.012 D3.2 D3.2@50.68,110.991 ; D2.2 D2.2@50.687,109.086 ; D1.2@50.687,106.63 D1.2 ; R17.2@51.197,97.409 51.445,97.657 R17.2 ; C13.1@54.911,104.907 C13.1 ; C10.1@54.911,110.485 C10.1 ; U4.18@56.919,110.438 U4.18 ; U4.31@57.346,103.915 U4.31 ; C7.1@61.369,116.746 C7.1 C7.1@61.548,116.845 ; Y1.4@63.327,119.113 Y1.4 ; R12.2 R12.2@73.015,109.168 ; C9.1 C9.1@73.105,115.311 ; C15.2@73.025,117.47 C15.2 C15.2@73.025,117.48 ; J3.2@88.314,99.363 J3.2 ; S1.1 S1.1@89.203,121.793
  Bottom Layer w0.254: C16.1@48.641,115.062 C16.1@48.768,115.189 ; J2.5@48.703,92.71 J2.5 48.925,92.74 J2.5@48.998,92.813 ; R14.2 48.773,117.48 48.773,119.375 R16.2 ; R11.2@54.102,102.805 R11.2@54.112,102.795 ; C4.1@54.102,104.643 C4.1 C4.1@54.102,104.653 ; U5.11@54.807,114.554 55.015,114.762 v2(55.015,115.154) ; U5.11@54.991,113.93 v2(55.015,113.954) ; U5.11@56.007,115.246 v2(55.915,115.154) U5.11@56.015,115.054 ; R15.2@62.66,111.193 R15.2 ; U3.4 64.298,103.673 U3.4@64.389,103.582 ; R10.2@68.189,105.335 R10.2 ; C6.1@68.189,107.564 C6.1 ; R3.2 R3.2@75.946,93.736 ; R2.2@78.792,92.095 R2.2
  other v2: 55.915,113.954 55.465,114.554
INfilter: R6.2 R7.1 U2.1 | length 18.9
  Top Layer w0.254: v1(81.153,95.504) 81.112,95.504 80.425,96.191 R7.1 88.265,96.266 89.789,94.742 89.789,90.932 89.316,90.459 89.098,90.459 88.555,89.916 U2.1
  Bottom Layer w0.254: v1(81.153,95.504) 81.222,95.504 81.583,95.143 R6.2
NetC1_1: C1.1 R7.2 R8.1 | length 8
  Top Layer w0.254: R8.1 75.712,101.229 C1.1 75.702,99.814 79.175,96.341 R7.2
NetC1_2: C1.2 U2.6 U2.7 U4.8 | length 38.7
  Top Layer w0.254: U4.8 63.392,112.961 63.392,113.742 63.5,113.85 v1(63.5,113.919) ; v1(73.025,110.617) 73.818,109.824 73.818,105.207 75.198,103.828 75.867,103.828 76.384,103.311 76.384,100.273 v1(76.962,99.695) C1.2 ; v1(79.883,94.361) 79.929,94.361 81.834,92.456 U2.6 U2.7
  Bottom Layer w0.254: v1(63.5,113.919) 69.723,113.919 v1(73.025,110.617) ; v1(76.962,99.695) 76.962,97.241 77.312,96.891 77.312,95.557 77.492,95.377 78.867,95.377 v1(79.883,94.361)
NetC2_2: C2.2 R8.2 U2.5 | length 14.9
  Top Layer w0.254: C2.2 76.962,104.511 R8.2 78.867,102.87 79.847,101.89 79.847,95.732 81.853,93.726 U2.5
NetC3_1: C3.1 R9.1 R10.1 U3.3 | length 18.8
  Top Layer w0.254: v1(54.737,100.965) 56.984,100.965 58.372,102.353 v1(60.619,102.353)
  Bottom Layer w0.254: v1(54.737,100.965) 54.737,98.791 54.981,98.547 R9.1 ; v1(60.619,102.353) 62.589,104.323 U3.3 U3.3@64.241,104.285 ; U3.3@64.241,104.323 65.927,104.323 66.939,105.335 R10.1
NetC4_2: C4.2 DCDC_IN1.1 R18.1 S1.3 U3.6 U3.7 | length 48
  Bottom Layer w0.254: C4.2 59.2,104.648 U3.7@59.525,104.973 ; U3.6 U3.7 ; 80.496,108.331 80.645,108.48
  Bottom Layer w0.508: U3.7 59.365,104.973 58.895,105.443 58.895,106.012 61.722,108.839 DCDC_IN1.1 63.76,108.839 64.014,108.585 69.469,108.585 70.437,107.617 73.104,107.617 73.818,108.331 80.496,108.331 ; R18.1 S1.3 80.645,120.269 80.645,108.48
NetC6_2: C6.2 U3.2 | length 4.3
  Bottom Layer w0.254: U3.2 65.222,104.973 66.929,106.68 66.929,107.564 C6.2
NetC11_1: C11.1 C12.1 | length 1.4
  Top Layer w0.254: C12.1 60.213,99.182 C11.1
NetC13_2: C13.2 U4.30 | length 3.3
  Top Layer w0.254: C13.2 55.071,106.167 56.388,104.85 56.388,104.543 56.537,104.394 56.747,104.394 56.768,104.415 57.346,104.415 U4.30
NetCHG1_1: CHG1.1 R13.2 | length 5.6
  Bottom Layer w0.254: R13.2 67.945,112.649 CHG1.1
NetD2_1: D2.1 J1.3 U4.46 | length 30.3
  Top Layer w0.254: J1.3 45.763,106.426 48.38,109.043 48.387,109.036 48.387,108.458 47.244,107.315 v1(47.244,106.68) ; v1(50.8,103.886) 54.378,100.308 65.72,100.308 65.869,100.457 U4.46 U4.46@65.869,101.888
  Bottom Layer w0.254: v1(47.244,106.68) 47.244,105.41 47.879,104.775 49.911,104.775 v1(50.8,103.886)
NetD3_1: D3.1 J1.2 U4.49 | length 27.3
  Top Layer w0.254: J1.2 45.747,109.247 46.686,109.247 48.387,110.948 49.304,110.031 49.481,110.031 v1(49.53,109.982) ; v1(58.928,108.966) 64.456,103.438 U4.49
  Bottom Layer w0.254: v1(49.53,109.982) 53.721,109.982 54.737,108.966 v1(58.928,108.966)
NetD7_1: D7.1 R11.1 | length 11.1
  Top Layer w0.254: D7.1 58.674,93.282 v1(58.674,94.488)
  Bottom Layer w0.254: R11.1 55.362,100.208 58.674,96.896 v1(58.674,94.488)
NetD8_1: D8.1 PWR_SRC.1 Q1.2 S1.2 | length 26.3
  Top Layer w0.508: v1(77.089,115.062) 80.645,115.062 83.821,118.238 S1.2
  Bottom Layer w0.254: PWR_SRC.1 66.802,119.456 67.818,118.44 Q1.2 75.661,116.49 v1(77.089,115.062)
NetJ2_2: J2.2 J2.3 | length 0.6
  Bottom Layer w0.5: J2.2 J2.3
NetJ4_3: J4.3 U4.58 | length 29.7
  Top Layer w0.254: v1(57.023,118.491) 57.023,117.233 57.099,117.156 57.099,116.778 57.023,116.701 57.023,113.284 62.369,107.938 U4.58 ; v1(61.468,121.92) 62.23,122.682 63.097,122.682 63.246,122.831 J4.3
  Bottom Layer w0.254: v1(57.023,118.491) 59.436,120.904 61.319,120.904 61.468,121.053 v1(61.468,121.92)
NetJ4_4: J4.4 U4.59 | length 22.7
  Top Layer w0.254: J4.4 65.786,123.395 69.403,119.778 70.645,119.778 72.373,118.049 72.373,116.901 72.254,116.782 71.697,116.782 69.977,115.062 v1(69.977,112.522) ; U4.59 70.142,108.438 70.289,108.585 v1(70.358,108.585)
  Bottom Layer w0.254: v1(69.977,112.522) 70.485,112.014 70.485,109.474 70.358,109.347 v1(70.358,108.585)
NetL1_1: L1.1 U3.5 | length 15
  Top Layer w0.254: L1.1 59.817,88.9 v1(59.817,91.948)
  Bottom Layer w0.254: v1(59.817,91.948) 59.817,92.017 60.003,92.203 U3.5
NetQ1_3: Q1.3 Q2.3 | length 10.3
  Top Layer w0.254: v1(68.834,115.824) 68.846,115.836 68.846,117.209 v1(68.857,117.221)
  Bottom Layer w0.254: Q2.3 63.749,116.083 64.008,115.824 v1(68.834,115.824) ; Q1.3 68.813,118.415 68.813,117.266 v1(68.857,117.221)
NetR1_2: R1.2 R3.1 U1.5 | length 13.5
  Bottom Layer w0.254: U1.5 70.866,100.33 70.352,99.816 70.352,95.204 71.755,93.801 R1.2 R3.1
NetR2_1: R2.1 R4.2 U2.3 | length 19.9
  Top Layer w0.254: v1(86.487,95.504) 87.757,95.504 89.281,93.98 89.281,92.605 89.132,92.456 U2.3
  Bottom Layer w0.254: R4.2 75.321,96.445 78.173,93.593 78.619,93.593 R2.1 80.391,93.345 81.534,94.488 84.074,94.488 85.09,95.504 v1(86.487,95.504)
NetR4_1: R4.1 U1.1 U1.2 | length 4.7
  Bottom Layer w0.254: U1.2 U1.1 75.565,98.679 76.571,97.673 R4.1
NetR5_1: R5.1 U1.7 | length 10.9
  Bottom Layer w0.254: U1.7 73.406,100.733 73.555,100.584 76.72,100.584 78.022,99.282 R5.1
NetR5_2: R5.2 R6.1 U2.2 | length 18.2
  Top Layer w0.254: U2.2 88.461,91.186 89.154,91.879 v1(89.154,91.948)
  Bottom Layer w0.254: R5.2 R6.1 85.14,96.393 86.105,97.358 88.454,97.358 90.424,95.389 90.424,93.218 v1(89.154,91.948)
NetR12_1: R12.1 U4.60 | length 3
  Top Layer w0.254: U4.60 70.064,108.938 70.169,109.042 70.547,109.042 70.652,108.938 71.61,108.938 R12.1
NetR13_1: R13.1 U5.8 | length 10.7
  Bottom Layer w0.254: U5.8@57.142,114.552 56.972,114.382 56.96,114.382 56.482,113.904 56.482,113.237 59.247,110.472 61.937,110.472 62.056,110.591 62.056,111.996 61.478,112.574 R13.1
NetR14_1: R14.1 U5.2 | length 5.8
  Top Layer w0.254: v1(50.546,116.205) 51.689,115.062 v1(51.689,114.046)
  Bottom Layer w0.254: R14.1 50.018,116.733 v1(50.546,116.205) ; v1(51.689,114.046) 52.346,114.046 52.354,114.054 U5.2
NetR15_1: R15.1 U5.9 | length 6.9
  Bottom Layer w0.254: U5.9 57.144,114.054 56.972,113.882 56.96,113.882 56.812,113.734 56.812,113.374 58.738,111.448 61.23,111.448 61.478,111.2 R15.1
NetR16_1: R16.1 U5.4 | length 6
  Bottom Layer w0.254: R16.1 50.028,119.305 51.578,117.755 51.578,116.358 52.88,115.056 53.338,115.056 U5.4
NetR18_2: R18.2 R19.1 U3.1 | length 45.9
  Top Layer w0.254: v1(61.849,107.061) 59.69,109.22 59.563,109.22 59.36,109.423 58.739,109.423 58.471,109.155 58.471,108.777 64.163,103.085 69.553,103.085 71.138,104.669 71.138,106.571 v1(72.771,108.204)
  Bottom Layer w0.254: v1(61.849,107.061) 63.54,107.061 64.203,106.398 U3.1 ; v1(72.771,108.204) 73.584,109.017 74.992,109.017 77.546,111.571 77.546,115.54 74.315,118.771 R19.1 74.368,119.815 74.368,121.739 R18.2
OSC_IN: C14.1 U4.5 Y1.3 | length 10.5
  Top Layer w0.254: U4.5 64.869,115.542 65.659,116.332 v1(65.659,117.094) ; v1(65.659,118.491) 65.728,118.491 65.877,118.64 67.154,118.64 Y1.3 69.959,119.113 C14.1
  Bottom Layer w0.254: v1(65.659,117.094) v1(65.659,118.491)
OSC_OUT: C15.1 U4.6 Y1.1 | length 12.6
  Top Layer w0.254: Y1.1 Y1.1@63.896,116.713 ; U4.6 64.369,116.24 Y1.1@63.896,116.713 ; C15.1 71.506,117.729 64.943,117.729 63.927,116.713 Y1.1@63.896,116.713
Vbatt: C17.2 CHG1.2 CHRG_OUT1.1 D5.1 J3.1 Q2.2 U5.10 | length 40.5
  Top Layer w0.254: v1(74.803,109.474) 74.852,109.425 74.852,109.262 75.642,108.472 D5.1 75.742,108.472 76.708,109.438 v1(76.708,109.474) ; J3.1@88.496,103.505 J3.1
  Top Layer w0.508: v1(78.867,109.474) 82.804,105.537 82.804,103.654 82.953,103.505 J3.1@88.496,103.505
  Bottom Layer w0.254: U5.10 61.94,113.554 62.733,114.347 C17.2 ; Q2.2 62.799,114.493 C17.2 ; v1(74.803,109.474) 74.803,110.236 CHRG_OUT1.1 CHG1.2 C17.2 ; v1(76.708,109.474) v1(78.867,109.474)
Vin: C16.2 CHRG_IN1.1 D4.1 J2.1 Q1.1 Q2.1 R17.1 U5.1 | length 72.8
  Top Layer w0.254: v1(51.689,112.776) 55.88,116.967 v1(56.642,116.967) ; v1(52.07,96.901) 52.07,96.832 52.312,96.59 52.312,96.158 D4.1 52.695,95.995 R17.1
  Top Layer w0.508: D4.1 52.585,93.225 v1(50.419,91.059) 50.419,88.773 CHRG_IN1.1
  Bottom Layer w0.254: J2.1 J2.1@48.746,90.213 ; v1(51.689,112.776) 49.737,112.776 C16.2@48.848,113.665 ; v1(52.07,96.901) 46.863,96.901 43.815,99.949 43.815,113.157 44.323,113.665 C16.2 C16.2@48.848,113.665 ; U5.1 51.068,113.554 50.957,113.665 C16.2@48.848,113.665 ; v1(56.642,116.967) 58.166,118.491 Q2.1 61.849,119.507 62.484,120.142 65.269,120.142 66.868,118.543 Q1.1 Q1.1@66.827,118.501
  Bottom Layer w0.508: J2.1@48.746,90.213 49.573,90.213 v1(50.419,91.059)
pads on no net: D8.2 U1.6 U3.8 U4.2 U4.3 U4.4 U4.7 U4.9 U4.10 U4.11 U4.14 U4.15 U4.16 U4.17 U4.20 U4.21 U4.22 U4.23 U4.24 U4.25 U4.26 U4.27 U4.28 U4.29 U4.33 U4.34 U4.35 U4.36 U4.37 U4.38 U4.39 U4.40 U4.41 U4.42 U4.43 U4.44 U4.45 U4.50 U4.51 U4.52 U4.53 U4.54 U4.55 U4.56 U4.57 U4.61 U4.62 U5.5 U5.6 VR1.3 Y1.2

## Polygon pours and split planes (outlines as drawn)
GND on Top Layer "GND_L01_P000" (solid, pour order 0): 46.101,126.619 43.18,123.698 43.18,85.979 45.974,83.185 89.916,83.185 93.345,86.614 93.345,124.841 91.567,126.619
GND on Bottom Layer "GND_L02_P003" (solid, pour order 3): 46.101,126.619 43.18,123.698 43.18,85.979 45.974,83.185 89.916,83.185 93.345,86.614 93.345,124.841 91.567,126.619

## Text inside footprints (layer, text, board x,y; h text height)
J2: Mechanical 1 "Board Edge" at 44.093,89.872 h0.3 r270